# Altium PCB RM-KM-CS  V1.0.PcbDoc
Units mm, origin at the board's own origin, x right, y up, seen from the top; angles counter-clockwise.
Board outline 152.4 x 101.6 mm, 2 copper layers (Top Layer, Bottom Layer); 24 components, 25 nets, 118 pads, 35 vias.
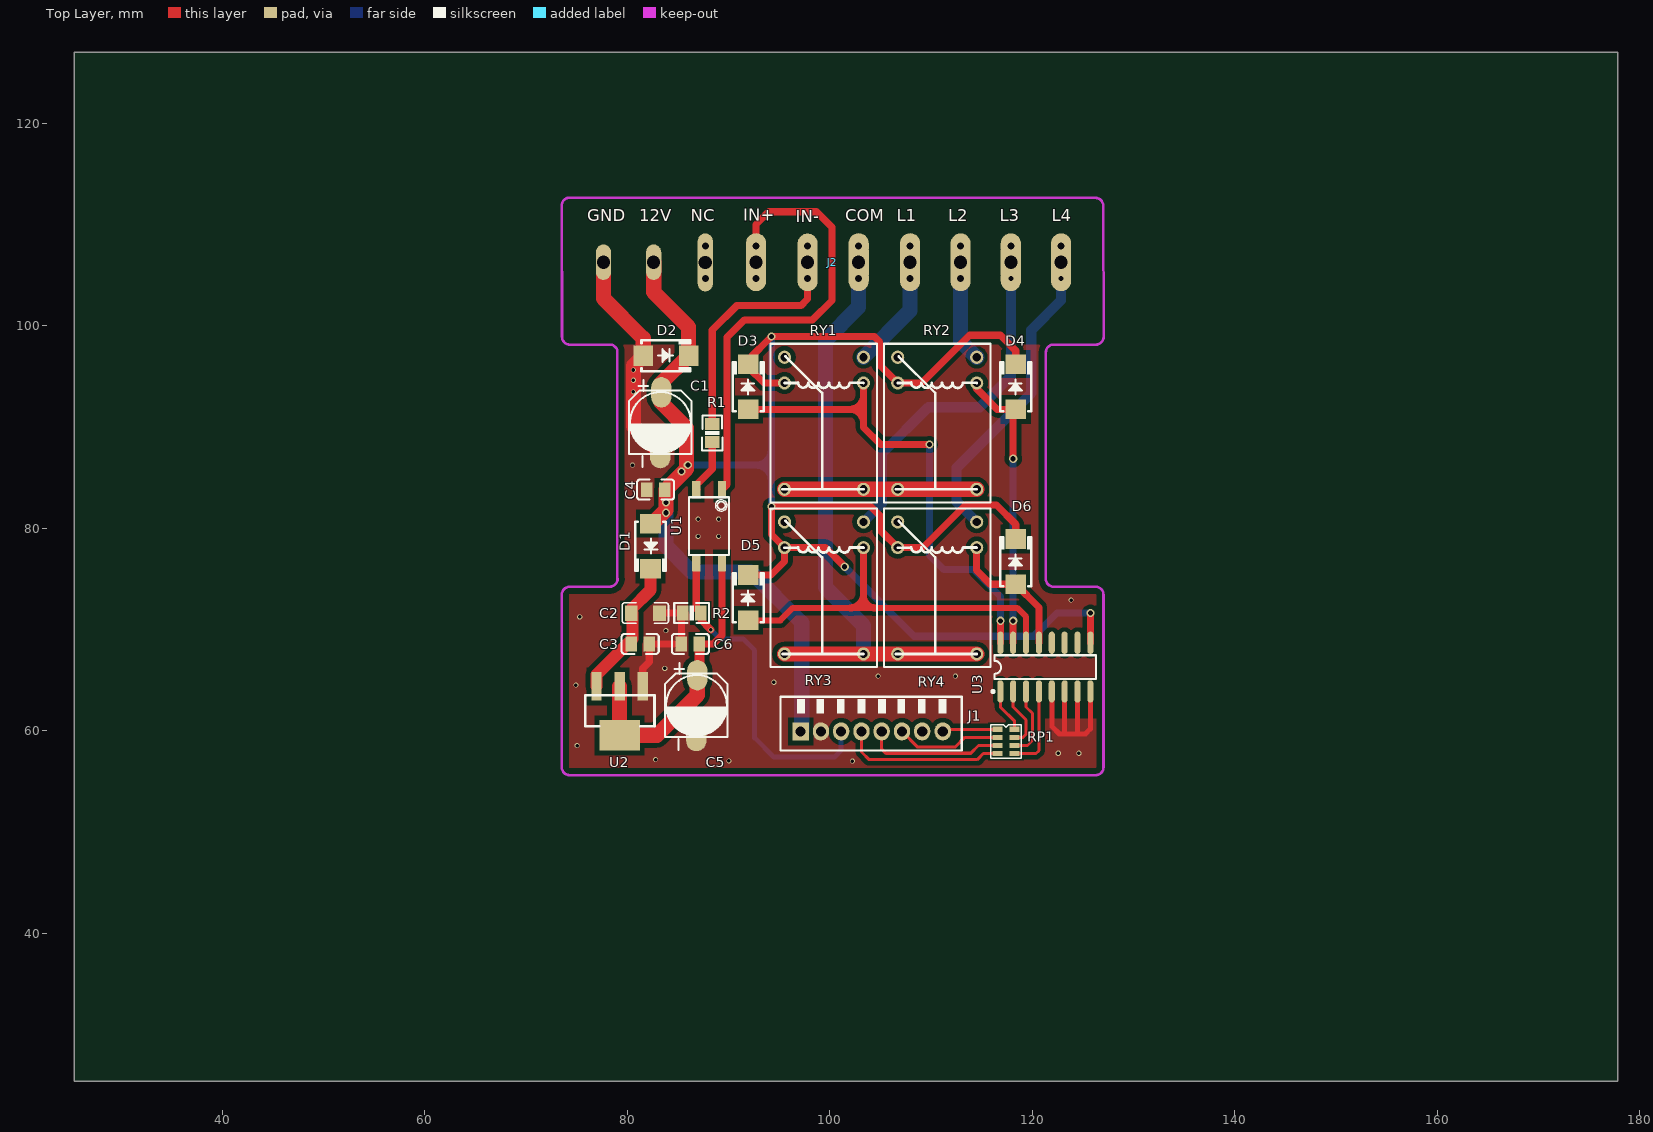
[diagram p0: Top Layer view]
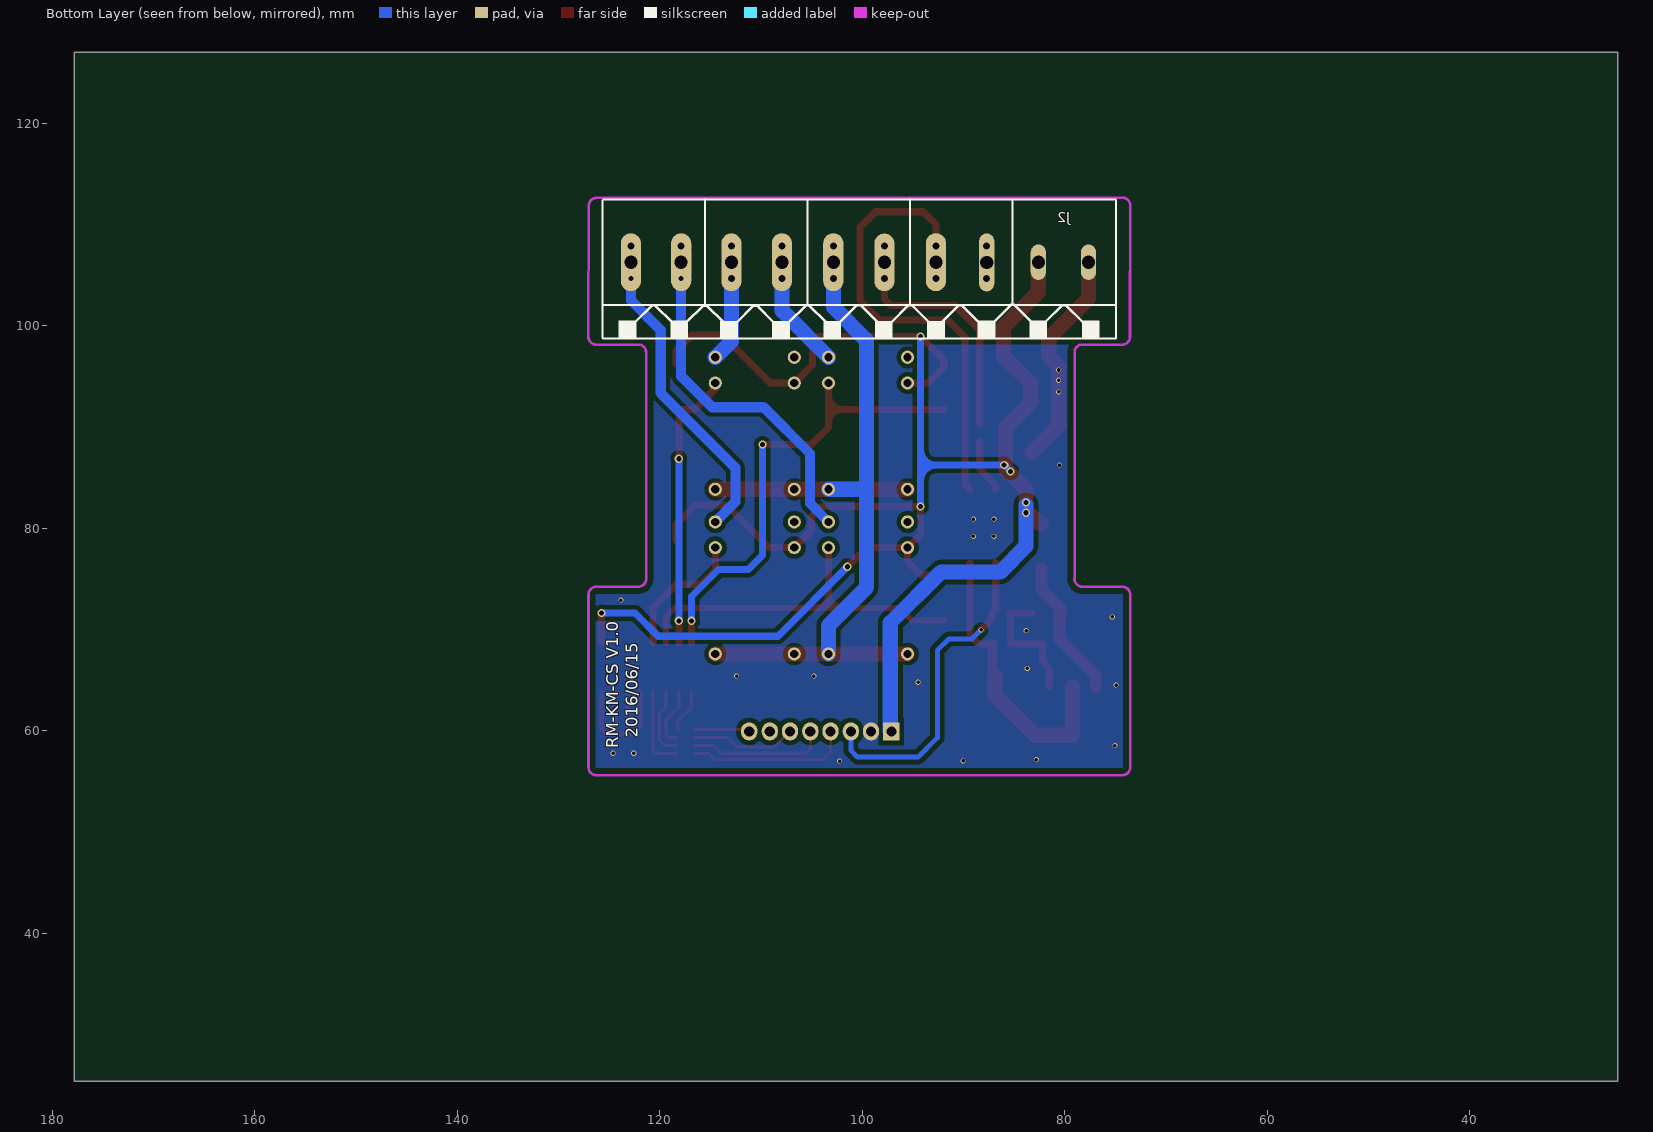
[diagram p1: Bottom Layer view, seen from below]
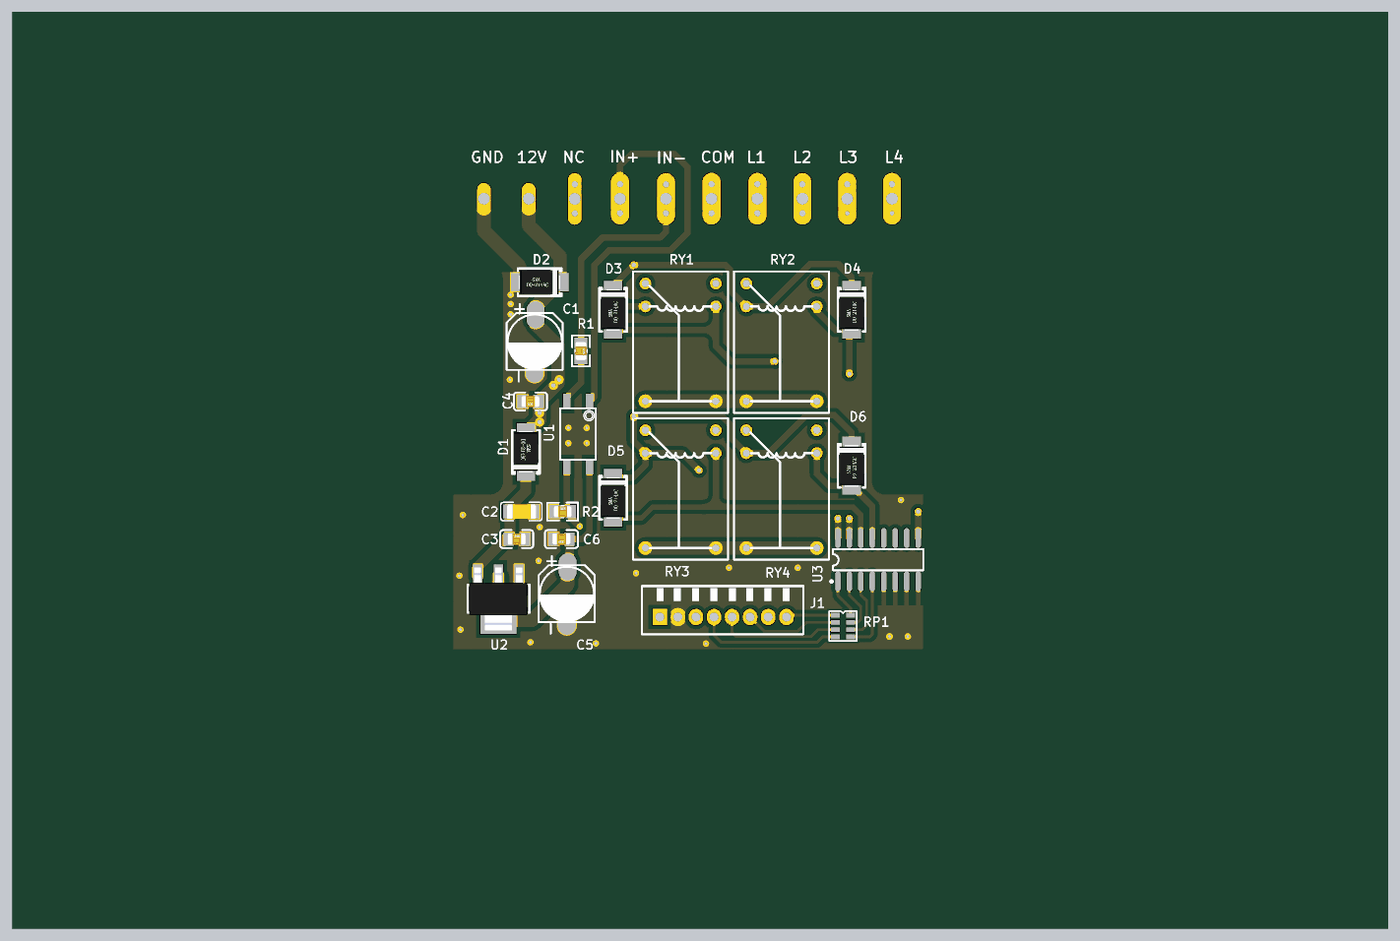
[diagram p2: 3D render of the assembled board from above, using the file's embedded part models]

## Layer stack, top to bottom
Top Layer: signal copper 0.0356
Dielectric: dielectric 0.32, FR-4, Dk 4.8
Bottom Layer: signal copper 0.0356

## Board outline
25.4,25.4 177.8,25.4 177.8,127 25.4,127

## Design rules (kind name [scope] priority, off if disabled: settings)
Clearance Clearance_1 [OnLayer('Keep-Out Layer')] p1: gap=0.6
Clearance [All] p2: gap=0.45
PlaneConnect [All] p1: planeconnectstyle=Direct reliefexpansion=0.508 reliefentries=4 reliefconductorwidth=0.254 reliefairgap=0.254
PolygonConnect [All] p1: connectstyle=Direct reliefconductorwidth=0.254 reliefentries=4 polygonreliefangle="90 Angle"
RoutingVias [All] p1: holewidth=0.711 width=1.27 viastyle="Through Hole" minholewidth=0.711 minwidth=1.27 maxholewidth=0.711 maxwidth=1.27
SilkscreenOverComponentPads [All] p1: minsilkscreentomaskgap=0.254
SolderMaskExpansion [All] p1: expansion=0.102
Width [All] p1: maxlimit=1.5 minlimit=0.3 preferedwidth=0.7
26 further rules are at their usual default settings.

## Components (designator, comment, footprint, x,y, rotation, side; value= is the part's Value field where it differs from the comment)
C1 "47uF/16V" 100uF/16V 83.312,90.424 r270 top
C2 "10uF" 1206C 81.788,71.628 r0 top
C3 "104" 0805C 81.28,68.58 r0 top
C4 "104" 0805C 82.804,83.82 r180 top
C5 "104" 0805C 86.233,68.58 r180 top
C6 "47uF/16V" 100uF/16V 86.868,62.484 r270 top
D1 "M7" M7 82.296,78.232 r270 top
D2 "M7" M7 83.82,97.028 r0 top
D3 "M7" M7 91.948,93.98 r90 top
D4 "M7" M7 118.364,93.98 r90 top
D5 "M7" M7 91.948,73.152 r90 top
D6 "M7" M7 118.364,76.708 r90 top
J1 "CON8" "DIP-8P-2.0 -1" 104.14,59.944 r0 top
J2 "CON10" SPI-10P-5.0_S 77.648,106.274 r0 top
R1 "1K" 0805R 88.392,89.408 r270 top
R2 "4.7K" 0805R 86.36,71.628 r0 top
RP1 "1K" RP_4P_0603_SMD 117.348,58.928 r0 top
RY1 "HK4100F-DC12V-SHG" RELAY 99.212,90.449 r180 top
RY2 "HK4100F-DC12V-SHG" RELAY 110.388,90.449 r180 top
RY3 "HK4100F-DC12V-SHG" RELAY 99.212,74.193 r180 top
RY4 "HK4100F-DC12V-SHG" RELAY 110.388,74.193 r180 top
U1 "EL357" EL357 87.884,80.264 r270 top
U2 "AMS1117-5" SOT-223 79.248,61.976 r270 top
U3 "ULN2003" SOIC16 121.412,66.04 r90 top

## Footprints (in the part's own frame and the unit in brackets; to place one, negate y for a bottom-side part, rotate by r counter-clockwise, add the part's x,y. Pads: shape width x height; smd on the part's side, far side on the other; paste and mask are expansions set on the pad)
100uF/16V [mm]
  oval 3x2 smd: 1(-3,0.05) 2(3,-0.05)
  silkscreen extent -4.21,-3.15 4.38,3.05
0805C [mm]
  rect 1.15x1.45 smd: 1(-0.889,0) 2(0.889,0)
  silkscreen extent -1.83,-0.99 1.83,0.99, body extent -1,-0.63 1,0.63, height 0.78
0805R [mm]
  rect 1.15x1.45 smd: 1(-0.889,0) 2(0.889,0)
  silkscreen extent -1.72,-0.99 1.71,0.99, body extent -1,-0.62 1,0.63, height 0.78
1206C [mil]
  rect 50x60 smd: 1(-55,0) 2(55,0)
  silkscreen extent -90,-40 90,40, body extent -62,-32 64,31, height 39
"DIP-8P-2.0 -1" [mm]
  rect 1.6x1.8 hole 1: 1(-7.016,0)
  oval 1.6x1.8 hole 1: 2(-5.016,0) 3(-3.016,0) 4(-1.016,0) 5(0.984,0) 6(2.984,0) 7(4.984,0) 8(7.016,0)
  silkscreen extent -9.01,-1.91 8.89,3.43
EL357 [mm] "SOP-4"
  rect 1.7x0.8 smd: 1(-3.548,1.468) 2(-3.548,-1.072) 3(3.672,-1.072) 4(3.672,1.468)
  silkscreen extent -2.8,-1.79 2.92,2.16
M7 [mil]
  rect 76x80 smd: A(-88,0) K(88,0)
  silkscreen extent -95,-60 95,60, body extent -92,-54 90,53, height 94
RELAY [mm]
  round 1.3 hole 0.813: 1(-4.115,6.604) 1(3.685,6.604) 2(3.685,-3.896) 3(3.685,-6.436) 4(-4.115,-6.436) 5(-4.115,-3.896)
  silkscreen extent -5.46,-7.77 5.05,7.9
RP_4P_0603_SMD [mil]
  rect 38x20 smd: 1(-31.5,48.2) 2(35.5,48.2) 3(-31.5,16.8) 4(35.5,16.8) 5(-31.5,-14.8) 6(35.5,-14.8) 7(-31.5,-46.2) 8(35.5,-46.2)
  silkscreen extent -58,-64 62,66
SOIC16 [mm]
  oval 2.2x0.6 smd: 1(-2.146,4.572) 2(-2.146,3.302) 3(-2.146,2.032) 4(-2.146,0.762) 5(-2.146,-0.508) 6(-2.146,-1.778) 7(-2.146,-3.048) 8(-2.146,-4.318) 9(2.654,-4.318) 10(2.654,-3.048) 11(2.654,-1.778) 12(2.654,-0.508) 13(2.654,0.762) 14(2.654,2.032) 15(2.654,3.302) 16(2.654,4.572)
  silkscreen extent -2.28,-4.87 1.42,5.41, body extent -1.7,-4.82 2.2,5.08, height 1.75
SOT-223 [mil]
  rect 110x40 smd: 1(-95,90) 2(-95,0) 3(-95,-90)
  rect 118.11x157.48 smd: 4(95,0)
  silkscreen extent -60,-134 60,135, body extent -136,-128 138,128, height 65
SPI-10P-5.0_S [mm]
  oval 1.5x3.5 hole 1.3: 1(0,0) 2(4.96,0)
  oval 1.5x2.5 hole 0.7: 3(10.06,-1.625) 3(10.06,1.595)
  rect 1.5x2.5 hole 1.3: 3(10.06,-0.02)
  oval 2x2.5 hole 0.7: 4(15.07,-1.605) 4(15.07,1.615) 5(20.159,-1.615) 5(20.159,1.585) 6(25.199,-1.615) 6(25.199,1.615) 7(30.28,-1.615) 7(30.28,1.615) 8(35.27,-1.615) 8(35.27,1.595) 9(40.23,1.605) 10(45.19,1.605)
  rect 2x2.5 hole 1.3: 4(15.07,0) 5(20.16,0) 6(25.2,0) 7(30.28,0) 8(35.27,0) 9(40.23,0) 10(45.19,0)
  oval 2x2.5 hole 0.5: 9(40.23,-1.605) 10(45.19,-1.605)

## Part data
C1 C6: library part ECAP
C2: library part ELECTRO1, "Electrolytic Capacitor"
C3 C4 C5: library part CAP
R1 R2: library part RES
RP1: library part RP-RESISTOR, "RP_0603_SMD"
RY1 RY2 RY3 RY4: library part RELAY5V
U1: library part 817
U2: library part VOL
U3: library part UNL2003, "UNL2003"

## Via types
v1: diameter 0.5, hole 0.35, Top Layer to Bottom Layer, 22 vias
v2: diameter 0.8, hole 0.5, Top Layer to Bottom Layer, 12 vias
v3: diameter 0.55, hole 0.35, Top Layer to Bottom Layer, 1 vias

## Nets (pads, with @x,y where several pads share a name; then routed paths per layer and width w, separated by ;. In a path a pad name is that pad's centre, name@x,y a point inside that pad or via, vN(x,y) a via of type N, cw(c..) or ccw(c..) an arc to the next point about the centre after c; other vN are vias at no path point)
+5V: C5.1 C6.1 U1.4 U2.2 U2.4 | length 29
  Top Layer w0.7: C5.1 88.493,68.58 89.352,69.439 U1.4
  Top Layer w1: C6.1 87.122,65.688 C5.1
  Top Layer w1.5: U2.2 U2.4 82.931,59.563 86.918,63.55 C6.1
+12V: C1.1 C4.1 D1.A D2.K D3.K D4.K D5.K D6.K J1.1 J2.2 RY1.2 RY2.2 RY3.2 RY4.2 U3.9 | length 210.8
  Top Layer w0.7: D5.K 94.183,75.387 95.527,76.731 RY3.2 ; RY1.2 93.488,94.345 91.948,95.885 D3.K 91.948,96.647 v2(94.234,98.933) 104.394,98.933 104.902,98.425 104.902,96.147 RY2.2 109.077,94.345 113.792,99.06 116.84,99.06 118.364,97.536 D4.K ; v2(101.473,76.2) 99.584,78.089 RY3.2 ; D6.K@118.262,78.842 D6.K@118.364,78.74 ; D6.K 118.364,80.391 116.459,82.296 113.411,82.296 109.204,78.089 RY4.2 ; U3.9 v2(125.73,71.628) ; RY3.2 94.227,79.389 94.227,82.162 v2(94.234,82.169) 104.013,82.169 105.029,81.153 105.029,79.764 RY4.2 ; RY4.2 cw(c106.719,78.089) RY4.2@106.719,78.105 ; RY4.2 cw(c106.719,78.089) RY4.2@106.719,78.105 ; RY4.2 cw(c106.719,78.089) RY4.2@106.719,78.105 ; RY4.2 cw(c106.719,78.089) RY4.2@106.719,78.105 ; RY4.2 RY4.2@106.719,78.105
  Top Layer w1.5: D1.A 82.499,80.467 83.82,81.788 83.82,83.82 85.852,85.852 ; J2.2 82.608,103.32 86.055,99.873 D2.K 83.362,94.335 C1.1 83.362,92.406 85.852,89.916 v2@85.852,86.233
  Bottom Layer w0.7: v2(85.344,85.598) v2(85.979,86.233) 92.71,86.233 ; 94.227,87.75 cw(c92.71,87.75) 92.71,86.233 ; v2(94.234,82.169) 94.227,82.176 94.227,84.716 ; v2(94.234,98.933) 94.227,98.926 94.227,86.233 ; v2(101.473,76.2) 108.331,69.342 120.142,69.342 122.428,71.628 v2(125.73,71.628) ; 92.71,86.233 cw(c92.71,84.716) 94.227,84.716 ; 92.71,86.233 94.227,86.233 ; 94.227,84.716 94.227,86.233
  Bottom Layer w1.5: v2@83.82,82.296 83.82,78.232 86.36,75.692 92.202,75.692 97.227,70.667 97.227,60.047 J1.1
  other v2: 83.82,81.534 83.82,82.55
COM: J2.6 RY1.1 RY2.1 RY3.1 RY4.1 | length 83.3
  Top Layer w1.5: RY3.1@95.527,67.589 99.568,67.589 103.327,67.589 105.156,67.589 106.703,67.589 RY4.1@114.503,67.589 ; RY1.1@95.527,83.845 103.327,83.845 106.703,83.845 RY2.1@114.503,83.845
  Bottom Layer w1.5: J2.6@102.848,106.274 102.848,101.832 99.568,98.552 99.568,83.82 ; RY3.1@103.327,67.589 103.327,70.409 99.568,74.168 99.568,83.82 ; RY1.1@103.327,83.845 99.593,83.845 99.568,83.82
COM1: J2.5 R1.1 | length 23.6
  Top Layer w0.7: R1.1 88.392,99.568 90.805,101.981 97.155,101.981 97.808,102.634 J2.5@97.808,106.274
GND: C1.2 C2.2 C3.2 C4.2 C5.2 C6.2 D2.A J1.2 J2.1 R2.1 U2.1 U3.5 U3.6 U3.7 U3.8 | length 55
  Top Layer w0.5: U3.5 121.92,60.452 122.682,59.69 124.46,59.69 ; 123.19,59.817 U3.6 ; U3.7 124.46,59.69 ; U3.8 125.73,60.198 125.222,59.69 124.46,59.69
  Top Layer w0.7: U2.1 81.534,66.167 82.169,66.802 C3.2 C5.2 C5.2@85.344,68.834 ; C2.2 85.217,71.628 R2.1@85.344,71.501 ; C5.2@85.09,68.58 C5.2@85.344,68.834 ; R2.1 R2.1@85.344,71.501 ; C5.2@85.344,68.834 R2.1@85.344,71.501
  Top Layer w1.5: J2.1 77.648,102.692 81.585,98.755 D2.A 80.61,96.053 80.61,90.076 C1.2
  other v1: 102.235,57 90.043,57.023 82.804,57.15 124.587,57.785 75.057,58.547 74.93,64.516 94.488,64.8 104.775,65.4 112.395,65.4 83.7,66.167 83.82,69.9 75.311,71.247 123.825,72.898 86.995,79.2 89.027,79.2 86.995,80.899 89.027,80.899 80.518,86.233 80.61,93.472 80.61,94.615 80.61,95.631
  other v3: 122.555,57.785
IN: J2.4 U1.1 | length 46.7
  Top Layer w0.7: U1.1 89.867,84.327 89.867,98.884 91.567,100.584 98.298,100.584 100.203,102.489 100.203,109.728 98.679,111.252 93.98,111.252 92.718,109.99 92.718,107.888 J2.4@92.718,106.274
IN_SIG: J1.3 R2.2 U1.3 | length 32.5
  Top Layer w0.7: U1.3 86.812,72.065 R2.2 87.249,70.98 v1@88.252,69.977
  Bottom Layer w0.5: v1(88.265,69.977) 89.154,69.088 91.44,69.088 92.583,67.945 92.583,59.309 94.488,57.404 100.457,57.404 101.124,58.071 J1.3
L1: J2.7 RY1.4 | length 12.9
  Top Layer w1.5: J2.7@107.928,104.658 J2.7@107.928,106.274
  Bottom Layer w1.5: RY1.4 107.928,101.486 107.928,104.658 J2.7@107.928,106.274
L2: J2.8 RY2.4 | length 11.7
  Top Layer w1.5: J2.8@112.918,104.658 J2.8@112.918,106.274
  Bottom Layer w1.5: J2.8@112.918,106.274 112.918,104.658 112.918,98.471 RY2.4
L3: J2.9 RY3.4 | length 34.6
  Bottom Layer w1: RY3.4 105.156,82.458 105.156,87.376 109.728,91.948 114.808,91.948 117.878,95.018 117.878,104.668 J2.9@117.878,106.274
L4: J2.10 RY4.4 | length 30.7
  Bottom Layer w1: RY4.4 112.522,82.611 112.522,85.979 119.888,93.345 119.888,99.568 122.838,102.518 122.838,104.668 J2.10@122.838,106.274
NetC2_1: C2.1 C3.1 D1.K U2.3 | length 13.9
  Top Layer w1.2: U2.3 76.962,65.532 80.518,69.088 C2.1@80.518,71.628 ; C2.1 80.391,72.009 82.296,73.914 82.296,75.145 D1.K
NetR1_2: R1.2 U1.2 | length 5.4
  Top Layer w0.7: U1.2@86.86,83.812 U1.2 86.812,84.272 88.392,85.852 R1.2
NetRP1_2: RP1.2 U3.1 | length 4.3
  Top Layer w0.3: U3.1 116.84,62.357 118.25,60.947 RP1.2
NetRP1_4: RP1.4 U3.2 | length 6
  Top Layer w0.3: U3.2 118.11,62.357 119.38,61.087 119.38,59.655 119.08,59.355 RP1.4
NetRP1_6: RP1.6 U3.3 | length 7.1
  Top Layer w0.3: RP1.6 119.512,58.552 120.015,59.055 120.015,61.722 119.38,62.357 U3.3
NetRP1_8: RP1.8 U3.4 | length 8.4
  Top Layer w0.3: RP1.8 120.366,57.755 120.65,58.039 U3.4
RL1: J1.8 RP1.1 | length 5.6
  Top Layer w0.3: J1.8@111.156,59.825 111.483,60.152 RP1.1
  Top Layer w0.5: J1.8@111.156,59.825 J1.8
RL1_OUT: D3.A RY1.5 U3.16 | length 51.8
  Top Layer w0.7: D3.A@91.961,91.732 D3.A 101.6,91.745 ; 103.327,90.424 ccw(c102.006,90.424) 102.006,91.745 101.981,91.745 ; 103.327,91.745 101.981,91.745 ; 103.327,93.091 cw(c101.981,93.091) 101.981,91.745 ; RY1.5 103.327,89.967 105.029,88.265 v2(109.855,88.265) ; U3.16 v2(116.84,70.866) ; 101.6,91.745 101.981,91.745 ; 101.6,91.745 101.981,91.745
  Bottom Layer w0.7: v2(109.855,88.265) 109.855,77.343 111.252,75.946 114.173,75.946 116.84,73.279 v2(116.84,70.866)
RL2: J1.6 RP1.3 | length 10.5
  Top Layer w0.3: J1.6 108.683,58.385 112.36,58.385 113.33,59.355 RP1.3
RL2_OUT: D4.A RY2.5 U3.15 | length 28.4
  Top Layer w0.7: RY2.5 114.503,93.777 116.535,91.745 D4.A 118.11,91.491 v2(118.11,86.868) ; U3.15 v2(118.11,70.866)
  Bottom Layer w0.7: v2(118.11,70.866) v2(118.11,86.868)
RL3: J1.5 RP1.5 | length 13.7
  Top Layer w0.3: J1.5 105.124,58.198 105.537,57.785 113.919,57.785 114.686,58.552 RP1.5
RL3_OUT: D5.A RY3.5 U3.14 | length 41.8
  Top Layer w0.6: D5.A@91.948,70.904 95.11,70.904 96.342,72.136 103.251,72.136 118.491,72.136 119.38,71.247 U3.14
  Top Layer w0.7: D5.A@91.935,70.904 D5.A ; 101.981,72.136 ccw(c101.981,73.482) 103.327,73.482 103.327,73.914 ; 103.327,72.212 103.327,72.593 103.327,73.914 ; RY3.5 103.327,73.914 ; 104.521,72.136 cw(c104.521,73.33) 103.327,73.33 103.327,73.914
RL4: J1.4 RP1.7 | length 16.5
  Top Layer w0.3: J1.4 103.124,57.912 103.886,57.15 114.554,57.15 115.158,57.754 RP1.7
  Top Layer w0.7: J1.4@103.124,59.436 J1.4
RL4_OUT: D6.A RY4.5 U3.13 | length 13.4
  Top Layer w0.7: RY4.5 114.503,75.819 115.849,74.473 D6.A 120.65,72.187 U3.13
pads on no net: J1.7 J2.3 RY1.3 RY2.3 RY3.3 RY4.3 U3.10 U3.11 U3.12

## Polygon pours and split planes (outlines as drawn)
GND on Bottom Layer "Bottom Layer-No Net" (solid, remove dead copper, pour order 1000): 75.057,98.14 75.058,98.139 124.968,98.139 126.272,98.139 127.025,97.386 127.025,71.628 127.025,56.388 126.263,55.626 84.582,55.626 74.422,55.626 73.533,56.515 73.533,72.644 73.533,96.616 75.057,98.14
GND on Top Layer "Bottom Layer-No Net" (solid, remove dead copper): 74.93,98.14 74.931,98.139 125.857,98.139 126.143,98.139 126.873,97.409 127.025,97.257 127.025,72.898 127.025,56.388 126.263,55.626 93.726,55.626 74.295,55.626 73.533,56.388 73.533,73.152 73.533,97.251 74.422,98.14 75.057,98.14

## Keep-outs
Keep-Out Layer:
  lines w0.254: 73.53,111.887 73.559,98.902 ccw(c74.321,98.902) 74.321,98.14 ; 73.538,111.887 cw(c74.3,111.887) 74.3,112.649 126.238,112.626 cw(c126.238,111.864) 127,111.864 127.034,98.901 cw(c126.272,98.901) 126.272,98.139 ; 74.295,74.219 ccw(c74.295,73.457) 73.533,73.457 73.533,56.388 ccw(c74.295,56.388) 74.295,55.626 126.263,55.626 ccw(c126.263,56.388) 127.025,56.388 127.025,73.457 ccw(c126.263,73.457) 126.263,74.219 ; 74.302,74.226 78.283,74.226 ; 74.422,98.14 78.232,98.14 ; 78.27,98.14 cw(c78.27,97.378) 79.032,97.378 ; 78.283,74.244 ccw(c78.283,75.006) 79.045,75.006 ; 79.033,75.006 79.033,97.378 ; 121.333,74.955 121.333,97.409 ; 121.333,74.993 ccw(c122.095,74.993) 122.095,74.231 ; 121.339,97.377 cw(c122.101,97.377) 122.101,98.139 ; 122.063,98.139 126.238,98.139 ; 122.095,74.226 126.18,74.226

## Other copper
Top Layer:
  pour cut-out: 121.094,65.278 126.301,65.278 126.301,61.214 121.094,61.214

## Silkscreen, mask and mechanical layers (free items; w line width, h text height)
Top Overlay:
  text "IN+" at 91.44,110.363 h1.2
  text "GND" at 76.073,110.312 h1.2
  text "12V" at 81.164,110.312 h1.2
  text "NC" at 86.256,110.312 h1.2
  text "COM" at 101.529,110.312 h1.2
  text "L1" at 106.621,110.312 h1.2
  text "L2" at 111.712,110.312 h1.2
  text "L3" at 116.803,110.312 h1.2
  text "L4" at 121.895,110.312 h1.2
  text "IN-" at 96.647,110.236 h1.2
Bottom Overlay:
  text "2016/06/15" at 122.174,59.309 h1.2 r270
  text "RM-KM-CS V1.0" at 124.079,58.293 h1.2 r270

## Text inside footprints (layer, text, board x,y; h text height)
C2: Mechanical 15 "1" at 81.624,71.178 h0.75
C3: Mechanical 15 "1" at 81.116,68.13 h0.75
C4: Mechanical 15 "1" at 82.968,84.27 h0.75 r180
C5: Mechanical 15 "1" at 86.397,69.03 h0.75 r180
R1: Mechanical 15 "1" at 87.942,89.572 h0.75 r270
R2: Mechanical 15 "1" at 86.196,71.178 h0.75
RP1: Mechanical 9 "8" at 118.504,57.754 h0.64 r270; Mechanical 9 "6" at 118.504,58.552 h0.64 r270; Mechanical 9 "4" at 118.504,59.355 h0.64 r270; Mechanical 9 "7" at 116.802,57.754 h0.64 r270; Mechanical 9 "5" at 116.802,58.552 h0.64 r270; Mechanical 9 "3" at 116.802,59.355 h0.64 r270; Mechanical 9 "1" at 116.802,60.152 h0.64 r270; Mechanical 9 "2" at 118.504,60.152 h0.64 r270